# Altium PCB Shining Pig 9V.PcbDoc (part 2 of 3)
Units mm, origin at the board's own origin, x right, y up, seen from the top; angles counter-clockwise.
Board outline 59.05 x 78.83 mm, 2 copper layers (Top Layer, Bottom Layer); 69 components, 43 nets, 179 pads, 197 vias.
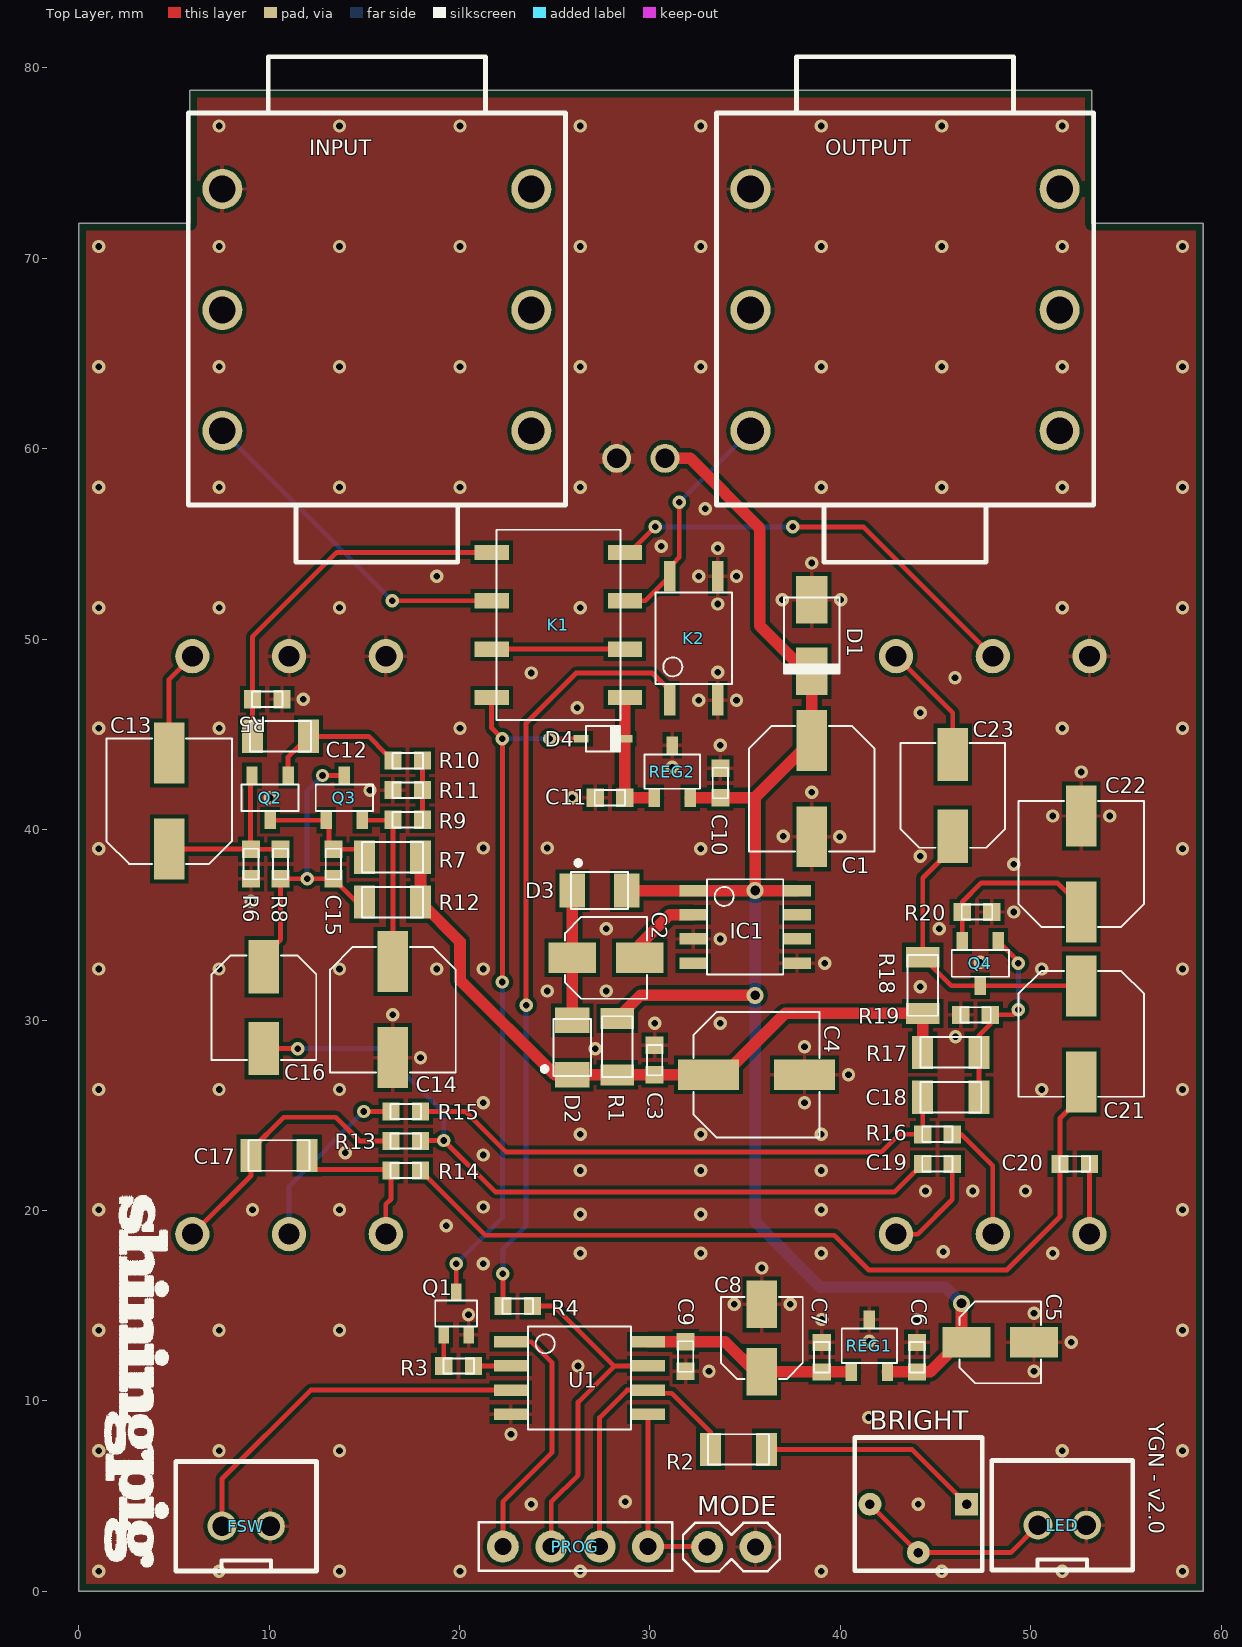
[diagram p0: Top Layer view]

## Part data (continued)
R3: library part CRCW060320K0FKEA, "RES SMD 20K OHM 1% 1/10W 0603", Case/Package=0603, Case Code (Metric)=1608, Manufacturer=Vishay, Max Operating Temperature=155°C, Min Operating Temperature=-55°C, Package Quantity=5000, Power Rating=100mW, Resistance=20kR, Supplier Part Number 1=1469774, Temperature Coefficient=100ppm/°C, Tolerance=1%, Voltage Rating=75V, Case Code (Imperial)=0603, ComponentLink1Description=https://datasheet.ciiva.com/5549/dcrcwe3-109170-5549626.pdf?src-supplier=Mouser, ComponentLink1URL=https://datasheet.ciiva.com/5549/dcrcwe3-109170-5549626.pdf?src-supplier=Mouser, ComponentLink2Description=https://datasheet.ciiva.com/26314/fld-crcw-e3-data-en-26314665.pdf?src-supplier=Distrelec, ComponentLink2URL=https://datasheet.ciiva.com/26314/fld-crcw-e3-data-en-26314665.pdf?src-supplier=Distrelec, ComponentLink3Description=https://datasheet.ciiva.com/3257/dcrcwe3-3257238.pdf?src-supplier=Avnet, ComponentLink3URL=https://datasheet.ciiva.com/3257/dcrcwe3-3257238.pdf?src-supplier=Avnet, ComponentLink4Description=https://datasheet.ciiva.com/7841/1697337-7841574.pdf?src-supplier=Element14, ComponentLink4URL=https://datasheet.ciiva.com/7841/1697337-7841574.pdf?src-supplier=Element14, ComponentLink5Description=https://datasheet.ciiva.com/3257/dcrcwe3-3257239.pdf?src-supplier=Avnet, ComponentLink5URL=https://datasheet.ciiva.com/3257/dcrcwe3-3257239.pdf?src-supplier=Avnet, ComponentLink6Description=https://datasheet.ciiva.com/16351/dcrcwe3-16351112.pdf?src-supplier=Future+Electronics, ComponentLink6URL=https://datasheet.ciiva.com/16351/dcrcwe3-16351112.pdf?src-supplier=Future+Electronics, ComponentLink7Description=https://datasheet.ciiva.com/16893/dcrcw-16893852.pdf?src-supplier=Avnet+Europe, ComponentLink7URL=https://datasheet.ciiva.com/16893/dcrcw-16893852.pdf?src-supplier=Avnet+Europe, Composition="Thick Film", Contact Plating=Tin, Depth=0.85mm, Height=0.45mm, Lead Free="Lead Free", Length=1.55mm, Manufacturer Part Number=CRCW060320K0FKEA, Military Standard=Not, Mount="Surface Mount", Number of Pins=2, Packaging="Tape and Reel", Price=0.0131, Pricing="10=0.0169, 100=0.013, 500=0.0113, 1000=0.008 (EUR)", Radiation Hardening=No, REACH SVHC=Unknown, RoHS=Yes, Stock=71220, Supplier 1=Farnell, Termination=SMD/SMT, Voltage Rating (DC)=75V, Weight=7.1E-05oz, Width=0.85mm
R4 R20: library part CRCW06031K00FKEA, "RES SMD 1K OHM 1% 1/10W 0603", Case/Package=0603, Case Code (Metric)=1608, Manufacturer="Vishay Dale", Max Operating Temperature=155°C, Max Power Dissipation=100mW, Min Operating Temperature=-55°C, Package Quantity=10, Resistance=1kR, Supplier Part Number 1=1469740, Temperature Coefficient=100ppm/°C, Tolerance=1%, Voltage Rating=75V, Case Code (Imperial)=0603, ComponentLink1Description=https://datasheet.ciiva.com/11808/0900766b80d98afc-11808625.pdf?src-supplier=RSComponents, ComponentLink1URL=https://datasheet.ciiva.com/11808/0900766b80d98afc-11808625.pdf?src-supplier=RSComponents, ComponentLink2Description=https://datasheet.ciiva.com/2465/dcrcwe3-2465536.pdf?src-supplier=Digi-Key, ComponentLink2URL=https://datasheet.ciiva.com/2465/dcrcwe3-2465536.pdf?src-supplier=Digi-Key, ComponentLink3Description=https://datasheet.ciiva.com/8336/dcrcwe3-8336822.pdf?src-supplier=Avnet, ComponentLink3URL=https://datasheet.ciiva.com/8336/dcrcwe3-8336822.pdf?src-supplier=Avnet, ComponentLink4Description=https://datasheet.ciiva.com/16515/dcrcwe3-16515078.pdf?src-supplier=Avnet+Asia, ComponentLink4URL=https://datasheet.ciiva.com/16515/dcrcwe3-16515078.pdf?src-supplier=Avnet+Asia, ComponentLink5Description=https://datasheet.ciiva.com/46441/1720486-46441622.pdf?src-supplier=Element14, ComponentLink5URL=https://datasheet.ciiva.com/46441/1720486-46441622.pdf?src-supplier=Element14, ComponentLink6Description=https://datasheet.ciiva.com/26316/fld-crcw-e3-data-en-26316551.pdf?src-supplier=Distrelec, ComponentLink6URL=https://datasheet.ciiva.com/26316/fld-crcw-e3-data-en-26316551.pdf?src-supplier=Distrelec, ComponentLink7Description=https://datasheet.ciiva.com/46441/1720486-46441623.pdf?src-supplier=Element14, ComponentLink7URL=https://datasheet.ciiva.com/46441/1720486-46441623.pdf?src-supplier=Element14, ComponentLink8Description=https://datasheet.ciiva.com/46385/1697337-46385497.pdf?src-supplier=Element14, ComponentLink8URL=https://datasheet.ciiva.com/46385/1697337-46385497.pdf?src-supplier=Element14, ComponentLink9Description=https://datasheet.ciiva.com/3257/dcrcwe3-3257132.pdf?src-supplier=Avnet, ComponentLink9URL=https://datasheet.ciiva.com/3257/dcrcwe3-3257132.pdf?src-supplier=Avnet, ComponentLink10Description=https://datasheet.ciiva.com/16199/dcrcwe3-16199053.pdf?src-supplier=Future+Electronics, ComponentLink10URL=https://datasheet.ciiva.com/16199/dcrcwe3-16199053.pdf?src-supplier=Future+Electronics, ComponentLink11Description=https://datasheet.ciiva.com/2465/dcrcwe3-2465534.pdf?src-supplier=Digi-Key, ComponentLink11URL=https://datasheet.ciiva.com/2465/dcrcwe3-2465534.pdf?src-supplier=Digi-Key, ComponentLink12Description=https://datasheet.ciiva.com/16893/dcrcwe3-16893742.pdf?src-supplier=Avnet+Europe, ComponentLink12URL=https://datasheet.ciiva.com/16893/dcrcwe3-16893742.pdf?src-supplier=Avnet+Europe, ComponentLink13Description=https://datasheet.ciiva.com/2465/dcrcwe3-2465535.pdf?src-supplier=Digi-Key, ComponentLink13URL=https://datasheet.ciiva.com/2465/dcrcwe3-2465535.pdf?src-supplier=Digi-Key, Composition="Thick Film", Contact Plating=Tin, Depth=0.85mm, Features="Automotive AEC-Q200", Height=0.45mm, Lead Free="Lead Free", Length=1.55mm, Manufacturer Part Number=CRCW06031K00FKEA, Military Standard=Not, Mount="Surface Mount", Number of Pins=2, Number of Terminations=2, Packaging="Tape and Reel", Power Rating=100mW, Price=0.013, Pricing="10=0.017, 100=0.0131, 500=0.0114, 1000=0.008, 2500=0.0061 (EUR)", Radiation Hardening=No, REACH SVHC=Unknown, RoHS=Yes, Stock=1083345, Supplier 1=Farnell, Termination=SMD/SMT, Voltage Rating (DC)=75V, Weight=7.1E-05oz, Width=0.033inch
R5: library part CRCW06032M20FKEA, "RES SMD 2.2M OHM 1% 1/10W 0603", Case/Package=0603, Case Code (Metric)=1608, Manufacturer=Vishay, Max Operating Temperature=155°C, Max Power Dissipation=100mW, Min Operating Temperature=-55°C, Package Quantity=10, Resistance=2.2MR, Supplier Part Number 1=2138646, Temperature Coefficient=100ppm/°C, Tolerance=1%, Voltage Rating=75V, Case Code (Imperial)=0603, ComponentLink1Description=https://datasheet.ciiva.com/11810/0900766b80d98afc-11810588.pdf?src-supplier=RSComponents, ComponentLink1URL=https://datasheet.ciiva.com/11810/0900766b80d98afc-11810588.pdf?src-supplier=RSComponents, ComponentLink2Description=https://datasheet.ciiva.com/2466/dcrcwe3-2466118.pdf?src-supplier=Digi-Key, ComponentLink2URL=https://datasheet.ciiva.com/2466/dcrcwe3-2466118.pdf?src-supplier=Digi-Key, ComponentLink3Description=https://datasheet.ciiva.com/22682/1912744-22682662.pdf?src-supplier=Element14, ComponentLink3URL=https://datasheet.ciiva.com/22682/1912744-22682662.pdf?src-supplier=Element14, ComponentLink4Description=https://datasheet.ciiva.com/7801/1697337-7801067.pdf?src-supplier=Element14, ComponentLink4URL=https://datasheet.ciiva.com/7801/1697337-7801067.pdf?src-supplier=Element14, ComponentLink5Description=https://datasheet.ciiva.com/22869/70201119-22869819.pdf?src-supplier=Allied+Electronics, ComponentLink5URL=https://datasheet.ciiva.com/22869/70201119-22869819.pdf?src-supplier=Allied+Electronics, ComponentLink6Description=https://datasheet.ciiva.com/26314/fld-crcw-e3-data-en-26314653.pdf?src-supplier=Distrelec, ComponentLink6URL=https://datasheet.ciiva.com/26314/fld-crcw-e3-data-en-26314653.pdf?src-supplier=Distrelec, ComponentLink7Description=https://datasheet.ciiva.com/3257/dcrcwe3-3257407.pdf?src-supplier=Avnet, ComponentLink7URL=https://datasheet.ciiva.com/3257/dcrcwe3-3257407.pdf?src-supplier=Avnet, ComponentLink8Description=https://datasheet.ciiva.com/2466/dcrcwe3-2466116.pdf?src-supplier=Digi-Key, ComponentLink8URL=https://datasheet.ciiva.com/2466/dcrcwe3-2466116.pdf?src-supplier=Digi-Key, ComponentLink9Description=https://datasheet.ciiva.com/2466/dcrcwe3-2466117.pdf?src-supplier=Digi-Key, ComponentLink9URL=https://datasheet.ciiva.com/2466/dcrcwe3-2466117.pdf?src-supplier=Digi-Key, ComponentLink10Description=https://datasheet.ciiva.com/16498/dcrcwe3-16498313.pdf?src-supplier=Future+Electronics, ComponentLink10URL=https://datasheet.ciiva.com/16498/dcrcwe3-16498313.pdf?src-supplier=Future+Electronics, ComponentLink11Description=https://datasheet.ciiva.com/7801/1697337-7801066.pdf?src-supplier=Element14, ComponentLink11URL=https://datasheet.ciiva.com/7801/1697337-7801066.pdf?src-supplier=Element14, Composition="Thick Film", Contact Plating=Tin, Depth=0.85mm, Features="Automotive AEC-Q200", Height=0.45mm, Lead Free="Lead Free", Length=1.55mm, Manufacturer Part Number=CRCW06032M20FKEA, Military Standard=Not, Mount="Surface Mount", Number of Pins=2, Number of Terminations=2, Packaging="Tape and Reel", Power Rating=100mW, Price=0.0165, Pricing="10=0.0212, 100=0.0163, 500=0.0141, 1000=0.0073 (EUR)", Radiation Hardening=No, REACH SVHC=Unknown, RoHS=Yes, Stock=19125, Supplier 1=Farnell, Termination=SMD/SMT, Voltage Rating (DC)=75V, Weight=7.1E-05oz, Width=0.85mm
R6 R13 R14: library part CRCW06034K70FKEA, "RES SMD 4.7K OHM 1% 1/10W 0603", Case/Package=0603, Case Code (Metric)=1608, Manufacturer=Vishay, Max Operating Temperature=155°C, Min Operating Temperature=-55°C, Package Quantity=5000, Power Rating=100mW, Resistance=4.7kR, Supplier Part Number 1=1469807, Temperature Coefficient=100ppm/°C, Tolerance=1%, Voltage Rating=75V, Case Code (Imperial)=0603, ComponentLink1Description=https://datasheet.ciiva.com/11809/0900766b80d98afc-11809859.pdf?src-supplier=RSComponents, ComponentLink1URL=https://datasheet.ciiva.com/11809/0900766b80d98afc-11809859.pdf?src-supplier=RSComponents, ComponentLink2Description=https://datasheet.ciiva.com/8079/1697337-8079646.pdf?src-supplier=Element14, ComponentLink2URL=https://datasheet.ciiva.com/8079/1697337-8079646.pdf?src-supplier=Element14, ComponentLink3Description=https://datasheet.ciiva.com/15159/getdatasheetpartid-33073-15159382.pdf?src-supplier=Verical, ComponentLink3URL=https://datasheet.ciiva.com/15159/getdatasheetpartid-33073-15159382.pdf?src-supplier=Verical, ComponentLink4Description=https://datasheet.ciiva.com/16199/dcrcwe3-16199366.pdf?src-supplier=Future+Electronics, ComponentLink4URL=https://datasheet.ciiva.com/16199/dcrcwe3-16199366.pdf?src-supplier=Future+Electronics, ComponentLink5Description=https://datasheet.ciiva.com/16764/70201119-16764918.pdf?src-supplier=Allied+Electronics, ComponentLink5URL=https://datasheet.ciiva.com/16764/70201119-16764918.pdf?src-supplier=Allied+Electronics, ComponentLink6Description=https://datasheet.ciiva.com/16520/dcrcwe3-16520616.pdf?src-supplier=Avnet+Asia, ComponentLink6URL=https://datasheet.ciiva.com/16520/dcrcwe3-16520616.pdf?src-supplier=Avnet+Asia, ComponentLink7Description=https://datasheet.ciiva.com/16724/70201119-16724106.pdf?src-supplier=Allied+Electronics, ComponentLink7URL=https://datasheet.ciiva.com/16724/70201119-16724106.pdf?src-supplier=Allied+Electronics, ComponentLink8Description=https://datasheet.ciiva.com/26314/fld-crcw-e3-data-en-26314735.pdf?src-supplier=Distrelec, ComponentLink8URL=https://datasheet.ciiva.com/26314/fld-crcw-e3-data-en-26314735.pdf?src-supplier=Distrelec, Composition="Thick Film", Contact Plating=Tin, Depth=0.85mm, Height=0.45mm, Lead Free="Lead Free", Length=1.55mm, Manufacturer Part Number=CRCW06034K70FKEA, Military Standard=Not, Mount="Surface Mount", Packaging="Tape and Reel", Price=0.0131, Pricing="10=0.0169, 100=0.013, 500=0.0113, 1000=0.0074 (EUR)", REACH SVHC=Unknown, RoHS=Yes, Stock=238464, Supplier 1=Farnell, Termination=SMD/SMT, Voltage Rating (DC)=75V, Weight=7.1E-05oz, Width=0.85mm
R7: library part CRCW1206120KFKEA, "RES SMD 120K OHM 1% 1/4W 1206", Case/Package=1206, Case Code (Metric)=3216, Manufacturer=Vishay, Max Operating Temperature=155°C, Max Power Dissipation=250mW, Min Operating Temperature=-55°C, Package Quantity=10, Resistance=120kR, Supplier Part Number 1=2139596, Temperature Coefficient=100ppm/°C, Tolerance=1%, Voltage Rating=200V, Case Code (Imperial)=1206, ComponentLink1Description=https://datasheet.ciiva.com/11808/0900766b80d98b5e-11808652.pdf?src-supplier=RSComponents, ComponentLink1URL=https://datasheet.ciiva.com/11808/0900766b80d98b5e-11808652.pdf?src-supplier=RSComponents, ComponentLink2Description=https://datasheet.ciiva.com/7714/1697337-7714312.pdf?src-supplier=Element14, ComponentLink2URL=https://datasheet.ciiva.com/7714/1697337-7714312.pdf?src-supplier=Element14, ComponentLink3Description=https://datasheet.ciiva.com/7714/1697337-7714313.pdf?src-supplier=Element14, ComponentLink3URL=https://datasheet.ciiva.com/7714/1697337-7714313.pdf?src-supplier=Element14, ComponentLink4Description=https://datasheet.ciiva.com/22708/1697337-22708105.pdf?src-supplier=Element14, ComponentLink4URL=https://datasheet.ciiva.com/22708/1697337-22708105.pdf?src-supplier=Element14, ComponentLink5Description=https://datasheet.ciiva.com/22675/1847332-22675915.pdf?src-supplier=Element14, ComponentLink5URL=https://datasheet.ciiva.com/22675/1847332-22675915.pdf?src-supplier=Element14, ComponentLink6Description=https://datasheet.ciiva.com/2469/dcrcwe3-2469512.pdf?src-supplier=Digi-Key, ComponentLink6URL=https://datasheet.ciiva.com/2469/dcrcwe3-2469512.pdf?src-supplier=Digi-Key, ComponentLink7Description=https://datasheet.ciiva.com/2469/dcrcwe3-2469510.pdf?src-supplier=Digi-Key, ComponentLink7URL=https://datasheet.ciiva.com/2469/dcrcwe3-2469510.pdf?src-supplier=Digi-Key, ComponentLink8Description=https://datasheet.ciiva.com/2469/dcrcwe3-2469511.pdf?src-supplier=Digi-Key, ComponentLink8URL=https://datasheet.ciiva.com/2469/dcrcwe3-2469511.pdf?src-supplier=Digi-Key, ComponentLink9Description=https://datasheet.ciiva.com/26316/fld-crcw-e3-data-en-26316475.pdf?src-supplier=Distrelec, ComponentLink9URL=https://datasheet.ciiva.com/26316/fld-crcw-e3-data-en-26316475.pdf?src-supplier=Distrelec, ComponentLink10Description=https://datasheet.ciiva.com/7800/125364-7800558.pdf?src-supplier=Element14, ComponentLink10URL=https://datasheet.ciiva.com/7800/125364-7800558.pdf?src-supplier=Element14, Composition="Thick Film", Contact Plating=Tin, Depth=1.6mm, Features="Automotive AEC-Q200", Height=0.55mm, Lead Free="Lead Free", Length=3.2mm, Manufacturer Part Number=CRCW1206120KFKEA, Military Standard=Not, Number of Terminations=2, Packaging="Tape and Reel", Power Rating=250mW, Price=0.028, Pricing="10=0.0415, 100=0.0276, 500=0.0231, 1000=0.0126, 2500=0.0116 (EUR)", Radiation Hardening=No, REACH SVHC=Unknown, RoHS=Yes, Stock=30156, Supplier 1=Farnell, Termination=SMD/SMT, Voltage Rating (DC)=200V, Weight=0.000353oz, Width=1.6mm
R8: library part CRCW060312K0FKEA, "RES SMD 12K OHM 1% 1/10W 0603", Case/Package=0603, Case Code (Metric)=1608, Manufacturer=Vishay, Max Operating Temperature=155°C, Max Power Dissipation=100mW, Min Operating Temperature=-55°C, Package Quantity=10, Resistance=12kR, Supplier Part Number 1=1652834, Temperature Coefficient=100ppm/°C, Tolerance=1%, Voltage Rating=75V, Case Code (Imperial)=0603, ComponentLink1Description=https://datasheet.ciiva.com/11811/0900766b80d98afc-11811312.pdf?src-supplier=RSComponents, ComponentLink1URL=https://datasheet.ciiva.com/11811/0900766b80d98afc-11811312.pdf?src-supplier=RSComponents, ComponentLink2Description=https://datasheet.ciiva.com/2466/dcrcwe3-2466560.pdf?src-supplier=Digi-Key, ComponentLink2URL=https://datasheet.ciiva.com/2466/dcrcwe3-2466560.pdf?src-supplier=Digi-Key, ComponentLink3Description=https://datasheet.ciiva.com/2466/dcrcwe3-2466561.pdf?src-supplier=Digi-Key, ComponentLink3URL=https://datasheet.ciiva.com/2466/dcrcwe3-2466561.pdf?src-supplier=Digi-Key, ComponentLink4Description=https://datasheet.ciiva.com/2466/dcrcwe3-2466562.pdf?src-supplier=Digi-Key, ComponentLink4URL=https://datasheet.ciiva.com/2466/dcrcwe3-2466562.pdf?src-supplier=Digi-Key, ComponentLink5Description=https://datasheet.ciiva.com/16430/dcrcwe3-16430069.pdf?src-supplier=Future+Electronics, ComponentLink5URL=https://datasheet.ciiva.com/16430/dcrcwe3-16430069.pdf?src-supplier=Future+Electronics, ComponentLink6Description=https://datasheet.ciiva.com/16515/dcrcwe3-16515029.pdf?src-supplier=Avnet+Asia, ComponentLink6URL=https://datasheet.ciiva.com/16515/dcrcwe3-16515029.pdf?src-supplier=Avnet+Asia, ComponentLink7Description=https://datasheet.ciiva.com/3256/dcrcwe3-3256998.pdf?src-supplier=Avnet, ComponentLink7URL=https://datasheet.ciiva.com/3256/dcrcwe3-3256998.pdf?src-supplier=Avnet, ComponentLink8Description=https://datasheet.ciiva.com/5545/dcrcwe3-109170-5545254.pdf?src-supplier=Mouser, ComponentLink8URL=https://datasheet.ciiva.com/5545/dcrcwe3-109170-5545254.pdf?src-supplier=Mouser, ComponentLink9Description=https://datasheet.ciiva.com/3256/dcrcwe3-3256999.pdf?src-supplier=Avnet, ComponentLink9URL=https://datasheet.ciiva.com/3256/dcrcwe3-3256999.pdf?src-supplier=Avnet, ComponentLink10Description=https://datasheet.ciiva.com/7841/1533075-7841820.pdf?src-supplier=Element14, ComponentLink10URL=https://datasheet.ciiva.com/7841/1533075-7841820.pdf?src-supplier=Element14, ComponentLink11Description=https://datasheet.ciiva.com/16885/dcrcwe3-16885263.pdf?src-supplier=Avnet+Europe, ComponentLink11URL=https://datasheet.ciiva.com/16885/dcrcwe3-16885263.pdf?src-supplier=Avnet+Europe, Composition="Thick Film", Contact Plating=Tin, Depth=0.85mm, Features="Automotive AEC-Q200", Height=0.45mm, Lead Free="Lead Free", Length=1.55mm, Manufacturer Part Number=CRCW060312K0FKEA, Military Standard=Not, Mount="Surface Mount", Number of Terminations=2, Packaging="Tape and Reel", Power Rating=100mW, Price=0.0074, Pricing="10=0.0169, 100=0.013, 500=0.0113, 1000=0.0068 (EUR)", Radiation Hardening=No, REACH SVHC=Unknown, RoHS=Yes, Stock=58266, Supplier 1=Farnell, Termination=SMD/SMT, Voltage Rating (DC)=75V, Weight=7.1E-05oz, Width=0.033inch
R9: library part CRCW0603470RFKEA, "RES SMD 470 OHM 1% 1/10W 0603", Case/Package=0603, Case Code (Metric)=1608, Manufacturer=Vishay, Max Operating Temperature=155°C, Max Power Dissipation=100mW, Min Operating Temperature=-55°C, Package Quantity=10, Supplier Part Number 1=1469815, Temperature Coefficient=100ppm/°C, Tolerance=1%, Voltage Rating=75V, Case Code (Imperial)=0603, ComponentLink1Description=https://datasheet.ciiva.com/11808/0900766b80d98afc-11808677.pdf?src-supplier=RSComponents, ComponentLink1URL=https://datasheet.ciiva.com/11808/0900766b80d98afc-11808677.pdf?src-supplier=RSComponents, ComponentLink2Description=https://datasheet.ciiva.com/2465/dcrcwe3-2465555.pdf?src-supplier=Digi-Key, ComponentLink2URL=https://datasheet.ciiva.com/2465/dcrcwe3-2465555.pdf?src-supplier=Digi-Key, ComponentLink3Description=https://datasheet.ciiva.com/5551/dcrcwe3-109170-5551784.pdf?src-supplier=Mouser, ComponentLink3URL=https://datasheet.ciiva.com/5551/dcrcwe3-109170-5551784.pdf?src-supplier=Mouser, ComponentLink4Description=https://datasheet.ciiva.com/7777/1720486-7777560.pdf?src-supplier=Element14, ComponentLink4URL=https://datasheet.ciiva.com/7777/1720486-7777560.pdf?src-supplier=Element14, ComponentLink5Description=https://datasheet.ciiva.com/7777/1720486-7777561.pdf?src-supplier=Element14, ComponentLink5URL=https://datasheet.ciiva.com/7777/1720486-7777561.pdf?src-supplier=Element14, ComponentLink6Description=https://datasheet.ciiva.com/26316/fld-crcw-e3-data-en-26316542.pdf?src-supplier=Distrelec, ComponentLink6URL=https://datasheet.ciiva.com/26316/fld-crcw-e3-data-en-26316542.pdf?src-supplier=Distrelec, ComponentLink7Description=https://datasheet.ciiva.com/2465/dcrcwe3-2465556.pdf?src-supplier=Digi-Key, ComponentLink7URL=https://datasheet.ciiva.com/2465/dcrcwe3-2465556.pdf?src-supplier=Digi-Key, ComponentLink8Description=https://datasheet.ciiva.com/2465/dcrcwe3-2465557.pdf?src-supplier=Digi-Key, ComponentLink8URL=https://datasheet.ciiva.com/2465/dcrcwe3-2465557.pdf?src-supplier=Digi-Key, ComponentLink9Description=https://datasheet.ciiva.com/15159/getdatasheetpartid-45798-15159558.pdf?src-supplier=Verical, ComponentLink9URL=https://datasheet.ciiva.com/15159/getdatasheetpartid-45798-15159558.pdf?src-supplier=Verical, ComponentLink10Description=https://datasheet.ciiva.com/16893/dcrcw-16893414.pdf?src-supplier=Avnet+Europe, ComponentLink10URL=https://datasheet.ciiva.com/16893/dcrcw-16893414.pdf?src-supplier=Avnet+Europe, ComponentLink11Description=https://datasheet.ciiva.com/3257/dcrcwe3-3257623.pdf?src-supplier=Avnet, ComponentLink11URL=https://datasheet.ciiva.com/3257/dcrcwe3-3257623.pdf?src-supplier=Avnet, ComponentLink12Description=https://datasheet.ciiva.com/3257/dcrcwe3-3257624.pdf?src-supplier=Avnet, ComponentLink12URL=https://datasheet.ciiva.com/3257/dcrcwe3-3257624.pdf?src-supplier=Avnet, ComponentLink13Description=https://datasheet.ciiva.com/7777/1697337-7777322.pdf?src-supplier=Element14, ComponentLink13URL=https://datasheet.ciiva.com/7777/1697337-7777322.pdf?src-supplier=Element14, Composition="Thick Film", Contact Plating=Tin, Depth=0.85mm, Features="Automotive AEC-Q200", Height=0.45mm, Lead Free="Lead Free", Length=1.55mm, Manufacturer Part Number=CRCW0603470RFKEA, Military Standard=Not, Mount="Surface Mount", Number of Terminations=2, Packaging="Tape and Reel", Power Rating=100mW, Price=0.0129, Pricing="10=0.017, 100=0.0131, 500=0.0114, 1000=0.008 (EUR)", Radiation Hardening=No, REACH SVHC=Unknown, Resistance=470R, RoHS=Yes, Stock=171327, Supplier 1=Farnell, Termination=SMD/SMT, Voltage Rating (DC)=75V, Weight=7.1E-05oz, Width=0.033inch
R10: library part CRCW0603150KFKEA, "RES SMD 150K OHM 1% 1/10W 0603", Case/Package=0603, Case Code (Metric)=1608, Manufacturer=Vishay, Max Operating Temperature=155°C, Min Operating Temperature=-55°C, Package Quantity=5000, Power Rating=100mW, Resistance=150kR, Supplier Part Number 1=1469759, Temperature Coefficient=100ppm/°C, Tolerance=1%, Voltage Rating=75V, Case Code (Imperial)=0603, ComponentLink1Description=https://datasheet.ciiva.com/11809/0900766b80d98afc-11809072.pdf?src-supplier=RSComponents, ComponentLink1URL=https://datasheet.ciiva.com/11809/0900766b80d98afc-11809072.pdf?src-supplier=RSComponents, ComponentLink2Description=https://datasheet.ciiva.com/5551/dcrcwe3-109170-5551862.pdf?src-supplier=Mouser, ComponentLink2URL=https://datasheet.ciiva.com/5551/dcrcwe3-109170-5551862.pdf?src-supplier=Mouser, ComponentLink3Description=https://datasheet.ciiva.com/3257/dcrcwe3-3257048.pdf?src-supplier=Avnet, ComponentLink3URL=https://datasheet.ciiva.com/3257/dcrcwe3-3257048.pdf?src-supplier=Avnet, ComponentLink4Description=https://datasheet.ciiva.com/7673/1697337-7673288.pdf?src-supplier=Element14, ComponentLink4URL=https://datasheet.ciiva.com/7673/1697337-7673288.pdf?src-supplier=Element14, ComponentLink5Description=https://datasheet.ciiva.com/3257/dcrcwe3-3257049.pdf?src-supplier=Avnet, ComponentLink5URL=https://datasheet.ciiva.com/3257/dcrcwe3-3257049.pdf?src-supplier=Avnet, ComponentLink6Description=https://datasheet.ciiva.com/16885/dcrcwe3-16885417.pdf?src-supplier=Avnet+Europe, ComponentLink6URL=https://datasheet.ciiva.com/16885/dcrcwe3-16885417.pdf?src-supplier=Avnet+Europe, ComponentLink7Description=https://datasheet.ciiva.com/15159/getdatasheetpartid-37540-15159436.pdf?src-supplier=Verical, ComponentLink7URL=https://datasheet.ciiva.com/15159/getdatasheetpartid-37540-15159436.pdf?src-supplier=Verical, ComponentLink8Description=https://datasheet.ciiva.com/16391/dcrcwe3-16391407.pdf?src-supplier=Future+Electronics, ComponentLink8URL=https://datasheet.ciiva.com/16391/dcrcwe3-16391407.pdf?src-supplier=Future+Electronics, ComponentLink9Description=https://datasheet.ciiva.com/16761/70201119-16761887.pdf?src-supplier=Allied+Electronics, ComponentLink9URL=https://datasheet.ciiva.com/16761/70201119-16761887.pdf?src-supplier=Allied+Electronics, Composition="Thick Film", Contact Plating=Tin, Depth=0.85mm, Height=0.45mm, Lead Free="Lead Free", Length=1.55mm, Manufacturer Part Number=CRCW0603150KFKEA, Military Standard=Not, Mount="Surface Mount", Packaging="Tape and Reel", Price=0.0093, Pricing="10=0.0112, 100=0.0092, 500=0.0084, 1000=0.0075 (EUR)", REACH SVHC=Unknown, RoHS=Yes, Stock=76499, Supplier 1=Farnell, Termination=SMD/SMT, Voltage Rating (DC)=75V, Weight=7.1E-05oz, Width=0.85mm
R11: library part CRCW06031K20FKEA, "RES SMD 1.2K OHM 1% 1/10W 0603", Case/Package=0603, Case Code (Metric)=1608, Manufacturer=Vishay, Max Operating Temperature=155°C, Max Power Dissipation=100mW, Min Operating Temperature=-55°C, Package Quantity=10, Resistance=1.2kR, Supplier Part Number 1=1469741, Temperature Coefficient=100ppm/°C, Tolerance=1%, Voltage Rating=75V, Case Code (Imperial)=0603, ComponentLink1Description=https://datasheet.ciiva.com/11811/0900766b80d98afc-11811521.pdf?src-supplier=RSComponents, ComponentLink1URL=https://datasheet.ciiva.com/11811/0900766b80d98afc-11811521.pdf?src-supplier=RSComponents, ComponentLink2Description=https://datasheet.ciiva.com/26316/fld-crcw-e3-data-en-26316553.pdf?src-supplier=Distrelec, ComponentLink2URL=https://datasheet.ciiva.com/26316/fld-crcw-e3-data-en-26316553.pdf?src-supplier=Distrelec, ComponentLink3Description=https://datasheet.ciiva.com/5562/dcrcwe3-109170-5562444.pdf?src-supplier=Mouser, ComponentLink3URL=https://datasheet.ciiva.com/5562/dcrcwe3-109170-5562444.pdf?src-supplier=Mouser, ComponentLink4Description=https://datasheet.ciiva.com/7777/1697337-7777549.pdf?src-supplier=Element14, ComponentLink4URL=https://datasheet.ciiva.com/7777/1697337-7777549.pdf?src-supplier=Element14, ComponentLink5Description=https://datasheet.ciiva.com/2466/dcrcwe3-2466208.pdf?src-supplier=Digi-Key, ComponentLink5URL=https://datasheet.ciiva.com/2466/dcrcwe3-2466208.pdf?src-supplier=Digi-Key, ComponentLink6Description=https://datasheet.ciiva.com/16778/70201119-16778936.pdf?src-supplier=Allied+Electronics, ComponentLink6URL=https://datasheet.ciiva.com/16778/70201119-16778936.pdf?src-supplier=Allied+Electronics, ComponentLink7Description=https://datasheet.ciiva.com/22871/70201119-22871945.pdf?src-supplier=Allied+Electronics, ComponentLink7URL=https://datasheet.ciiva.com/22871/70201119-22871945.pdf?src-supplier=Allied+Electronics, ComponentLink8Description=https://datasheet.ciiva.com/7777/1697337-7777291.pdf?src-supplier=Element14, ComponentLink8URL=https://datasheet.ciiva.com/7777/1697337-7777291.pdf?src-supplier=Element14, ComponentLink9Description=https://datasheet.ciiva.com/2466/dcrcwe3-2466206.pdf?src-supplier=Digi-Key, ComponentLink9URL=https://datasheet.ciiva.com/2466/dcrcwe3-2466206.pdf?src-supplier=Digi-Key, ComponentLink10Description=https://datasheet.ciiva.com/2466/dcrcwe3-2466207.pdf?src-supplier=Digi-Key, ComponentLink10URL=https://datasheet.ciiva.com/2466/dcrcwe3-2466207.pdf?src-supplier=Digi-Key, Composition="Thick Film", Contact Plating=Tin, Depth=0.85mm, Features="Automotive AEC-Q200", Height=0.45mm, Lead Free="Lead Free", Length=1.55mm, Manufacturer Part Number=CRCW06031K20FKEA, Military Standard=Not, Mount="Surface Mount", Number of Terminations=2, Packaging="Tape and Reel", Power Rating=100mW, Price=0.0128, Pricing="10=0.0169, 100=0.013, 500=0.0113, 1000=0.008 (EUR)", Radiation Hardening=No, REACH SVHC=Unknown, RoHS=Yes, Stock=73390, Supplier 1=Farnell, Termination=SMD/SMT, Voltage Rating (DC)=75V, Weight=7.1E-05oz, Width=0.033inch
R12: library part CRCW12061K80FKEA, "RES SMD 1.8K OHM 1% 1/4W 1206", Case/Package=1206, Case Code (Metric)=3216, Manufacturer=Vishay, Max Operating Temperature=155°C, Max Power Dissipation=250mW, Min Operating Temperature=-55°C, Package Quantity=10, Resistance=1.8kR, Supplier Part Number 1=2139458, Temperature Coefficient=100ppm/°C, Tolerance=1%, Voltage Rating=200V, Case Code (Imperial)=1206, ComponentLink1Description=https://datasheet.ciiva.com/11811/0900766b80d98b5e-11811553.pdf?src-supplier=RSComponents, ComponentLink1URL=https://datasheet.ciiva.com/11811/0900766b80d98b5e-11811553.pdf?src-supplier=RSComponents, ComponentLink2Description=https://datasheet.ciiva.com/2515/dcrcwe3-2515619.pdf?src-supplier=Digi-Key, ComponentLink2URL=https://datasheet.ciiva.com/2515/dcrcwe3-2515619.pdf?src-supplier=Digi-Key, ComponentLink3Description=https://datasheet.ciiva.com/2515/dcrcwe3-2515620.pdf?src-supplier=Digi-Key, ComponentLink3URL=https://datasheet.ciiva.com/2515/dcrcwe3-2515620.pdf?src-supplier=Digi-Key, ComponentLink4Description=https://datasheet.ciiva.com/2515/dcrcwe3-2515621.pdf?src-supplier=Digi-Key, ComponentLink4URL=https://datasheet.ciiva.com/2515/dcrcwe3-2515621.pdf?src-supplier=Digi-Key, ComponentLink5Description=https://datasheet.ciiva.com/5550/dcrcwe3-109170-5550215.pdf?src-supplier=Mouser, ComponentLink5URL=https://datasheet.ciiva.com/5550/dcrcwe3-109170-5550215.pdf?src-supplier=Mouser, ComponentLink6Description=https://datasheet.ciiva.com/17203/dcrcwe3-17203511.pdf?src-supplier=Avnet+Europe, ComponentLink6URL=https://datasheet.ciiva.com/17203/dcrcwe3-17203511.pdf?src-supplier=Avnet+Europe, ComponentLink7Description=https://datasheet.ciiva.com/22704/1697337-22704456.pdf?src-supplier=Element14, ComponentLink7URL=https://datasheet.ciiva.com/22704/1697337-22704456.pdf?src-supplier=Element14, ComponentLink8Description=https://datasheet.ciiva.com/9096/dcrcwe3-9096428.pdf?src-supplier=Avnet, ComponentLink8URL=https://datasheet.ciiva.com/9096/dcrcwe3-9096428.pdf?src-supplier=Avnet, ComponentLink9Description=https://datasheet.ciiva.com/7673/1697337-7673053.pdf?src-supplier=Element14, ComponentLink9URL=https://datasheet.ciiva.com/7673/1697337-7673053.pdf?src-supplier=Element14, ComponentLink10Description=https://datasheet.ciiva.com/7800/125364-7800621.pdf?src-supplier=Element14, ComponentLink10URL=https://datasheet.ciiva.com/7800/125364-7800621.pdf?src-supplier=Element14, ComponentLink11Description=https://datasheet.ciiva.com/7673/1697337-7673054.pdf?src-supplier=Element14, ComponentLink11URL=https://datasheet.ciiva.com/7673/1697337-7673054.pdf?src-supplier=Element14, ComponentLink12Description=https://datasheet.ciiva.com/16763/70201119-16763566.pdf?src-supplier=Allied+Electronics, ComponentLink12URL=https://datasheet.ciiva.com/16763/70201119-16763566.pdf?src-supplier=Allied+Electronics, ComponentLink13Description=https://datasheet.ciiva.com/16498/dcrcwe3-16498255.pdf?src-supplier=Future+Electronics, ComponentLink13URL=https://datasheet.ciiva.com/16498/dcrcwe3-16498255.pdf?src-supplier=Future+Electronics, Composition="Thick Film", Contact Plating=Tin, Depth=1.6mm, Features="Automotive AEC-Q200", Height=0.55mm, Lead Free="Lead Free", Length=3.2mm, Manufacturer Part Number=CRCW12061K80FKEA, Military Standard=Not, Number of Terminations=2, Packaging="Tape and Reel", Power Rating=250mW, Price=0.0273, Pricing="10=0.0415, 100=0.0276, 500=0.023, 1000=0.0135, 2500=0.0116 (EUR)", Radiation Hardening=No, REACH SVHC=Unknown, RoHS=Yes, Stock=21216, Supplier 1=Farnell, Termination=SMD/SMT, Voltage Rating (DC)=200V, Weight=0.000353oz, Width=0.063inch
R15: library part CRCW060339K0FKEA, "RES SMD 39K OHM 1% 1/10W 0603", Case/Package=0603, Case Code (Metric)=1608, Manufacturer=Vishay, Max Operating Temperature=155°C, Max Power Dissipation=100mW, Min Operating Temperature=-55°C, Package Quantity=10, Resistance=39kR, Supplier Part Number 1=1469804, Temperature Coefficient=100ppm/°C, Tolerance=1%, Voltage Rating=75V, Case Code (Imperial)=0603, ComponentLink1Description=https://datasheet.ciiva.com/11810/0900766b80d98afc-11810034.pdf?src-supplier=RSComponents, ComponentLink1URL=https://datasheet.ciiva.com/11810/0900766b80d98afc-11810034.pdf?src-supplier=RSComponents, ComponentLink2Description=https://datasheet.ciiva.com/16436/dcrcwe3-16436039.pdf?src-supplier=Future+Electronics, ComponentLink2URL=https://datasheet.ciiva.com/16436/dcrcwe3-16436039.pdf?src-supplier=Future+Electronics, ComponentLink3Description=https://datasheet.ciiva.com/2465/dcrcwe3-2465918.pdf?src-supplier=Digi-Key, ComponentLink3URL=https://datasheet.ciiva.com/2465/dcrcwe3-2465918.pdf?src-supplier=Digi-Key, ComponentLink4Description=https://datasheet.ciiva.com/3257/dcrcwe3-3257518.pdf?src-supplier=Avnet, ComponentLink4URL=https://datasheet.ciiva.com/3257/dcrcwe3-3257518.pdf?src-supplier=Avnet, ComponentLink5Description=https://datasheet.ciiva.com/2465/dcrcwe3-2465920.pdf?src-supplier=Digi-Key, ComponentLink5URL=https://datasheet.ciiva.com/2465/dcrcwe3-2465920.pdf?src-supplier=Digi-Key, ComponentLink6Description=https://datasheet.ciiva.com/7841/1697337-7841830.pdf?src-supplier=Element14, ComponentLink6URL=https://datasheet.ciiva.com/7841/1697337-7841830.pdf?src-supplier=Element14, ComponentLink7Description=https://datasheet.ciiva.com/16514/dcrcwe3-16514791.pdf?src-supplier=Avnet+Asia, ComponentLink7URL=https://datasheet.ciiva.com/16514/dcrcwe3-16514791.pdf?src-supplier=Avnet+Asia, ComponentLink8Description=https://datasheet.ciiva.com/16768/70201119-16768839.pdf?src-supplier=Allied+Electronics, ComponentLink8URL=https://datasheet.ciiva.com/16768/70201119-16768839.pdf?src-supplier=Allied+Electronics, ComponentLink9Description=https://datasheet.ciiva.com/7841/1697337-7841593.pdf?src-supplier=Element14, ComponentLink9URL=https://datasheet.ciiva.com/7841/1697337-7841593.pdf?src-supplier=Element14, ComponentLink10Description=https://datasheet.ciiva.com/3257/dcrcwe3-3257519.pdf?src-supplier=Avnet, ComponentLink10URL=https://datasheet.ciiva.com/3257/dcrcwe3-3257519.pdf?src-supplier=Avnet, ComponentLink11Description=https://datasheet.ciiva.com/26316/fld-crcw-e3-data-en-26316550.pdf?src-supplier=Distrelec, ComponentLink11URL=https://datasheet.ciiva.com/26316/fld-crcw-e3-data-en-26316550.pdf?src-supplier=Distrelec, ComponentLink12Description=https://datasheet.ciiva.com/2465/dcrcwe3-2465919.pdf?src-supplier=Digi-Key, ComponentLink12URL=https://datasheet.ciiva.com/2465/dcrcwe3-2465919.pdf?src-supplier=Digi-Key, ComponentLink13Description=https://datasheet.ciiva.com/5551/dcrcwe3-109170-5551951.pdf?src-supplier=Mouser, ComponentLink13URL=https://datasheet.ciiva.com/5551/dcrcwe3-109170-5551951.pdf?src-supplier=Mouser, Composition="Thick Film", Contact Plating=Tin, Depth=0.85mm, Features="Automotive AEC-Q200", Height=0.45mm, Lead Free="Lead Free", Length=1.55mm, Manufacturer Part Number=CRCW060339K0FKEA, Military Standard=Not, Mount="Surface Mount", Number of Pins=2, Number of Terminations=2, Packaging="Tape and Reel", Power Rating=100mW, Price=0.0093, Pricing="10=0.0112, 100=0.0092, 500=0.0084, 1000=0.0075 (EUR)", Radiation Hardening=No, REACH SVHC=Unknown, RoHS=Yes, Stock=76312, Supplier 1=Farnell, Termination=SMD/SMT, Voltage Rating (DC)=75V, Weight=7.1E-05oz, Width=0.033inch
R16: library part CRCW06035K60FKEA, "RES SMD 5.6K OHM 1% 1/10W 0603", Case/Package=0603, Case Code (Metric)=1608, Manufacturer=Vishay, Max Operating Temperature=155°C, Min Operating Temperature=-55°C, Package Quantity=5000, Power Rating=100mW, Resistance=5.6kR, Supplier Part Number 1=1469820, Temperature Coefficient=100ppm/°C, Tolerance=1%, Voltage Rating=75V, Case Code (Imperial)=0603, ComponentLink1Description=https://datasheet.ciiva.com/3883/41405319s7915995n6892-3883091.pdf?src-supplier=Arrow, ComponentLink1URL=https://datasheet.ciiva.com/3883/41405319s7915995n6892-3883091.pdf?src-supplier=Arrow, ComponentLink2Description=https://datasheet.ciiva.com/11809/0900766b80d98afc-11809147.pdf?src-supplier=RSComponents, ComponentLink2URL=https://datasheet.ciiva.com/11809/0900766b80d98afc-11809147.pdf?src-supplier=RSComponents, ComponentLink3Description=https://datasheet.ciiva.com/26314/fld-crcw-e3-data-en-26314743.pdf?src-supplier=Distrelec, ComponentLink3URL=https://datasheet.ciiva.com/26314/fld-crcw-e3-data-en-26314743.pdf?src-supplier=Distrelec, ComponentLink4Description=https://datasheet.ciiva.com/16786/70201119-16786959.pdf?src-supplier=Allied+Electronics, ComponentLink4URL=https://datasheet.ciiva.com/16786/70201119-16786959.pdf?src-supplier=Allied+Electronics, ComponentLink5Description=https://datasheet.ciiva.com/3257/dcrcwe3-3257768.pdf?src-supplier=Avnet, ComponentLink5URL=https://datasheet.ciiva.com/3257/dcrcwe3-3257768.pdf?src-supplier=Avnet, ComponentLink6Description=https://datasheet.ciiva.com/3257/dcrcwe3-3257769.pdf?src-supplier=Avnet, ComponentLink6URL=https://datasheet.ciiva.com/3257/dcrcwe3-3257769.pdf?src-supplier=Avnet, ComponentLink7Description=https://datasheet.ciiva.com/7841/1697337-7841836.pdf?src-supplier=Element14, ComponentLink7URL=https://datasheet.ciiva.com/7841/1697337-7841836.pdf?src-supplier=Element14, ComponentLink8Description=https://datasheet.ciiva.com/7841/1697337-7841613.pdf?src-supplier=Element14, ComponentLink8URL=https://datasheet.ciiva.com/7841/1697337-7841613.pdf?src-supplier=Element14, Composition="Thick Film", Contact Plating=Tin, Depth=0.85mm, Height=0.45mm, Lead Free="Lead Free", Length=1.55mm, Manufacturer Part Number=CRCW06035K60FKEA, Military Standard=Not, Mount="Surface Mount", Number of Pins=2, Number of Terminations=2, Packaging="Tape and Reel", Price=0.0093, Pricing="10=0.0112, 100=0.0092, 500=0.0084, 1000=0.0061 (EUR)", Radiation Hardening=No, REACH SVHC=Unknown, RoHS=Yes, Stock=87511, Supplier 1=Farnell, Termination=SMD/SMT, Voltage Rating (DC)=75V, Weight=7.1E-05oz, Width=0.85mm, Working Voltage=75V
R17: library part CRCW1206180KFKEA, "RES SMD 180K OHM 1% 1/4W 1206", Case/Package=1206, Case Code (Metric)=3216, Manufacturer=Vishay, Max Operating Temperature=155°C, Max Power Dissipation=250mW, Min Operating Temperature=-55°C, Package Quantity=10, Resistance=180kR, Supplier Part Number 1=2139611, Temperature Coefficient=100ppm/°C, Tolerance=1%, Voltage Rating=200V, Case Code (Imperial)=1206, ComponentLink1Description=https://datasheet.ciiva.com/11811/0900766b80d98b5e-11811640.pdf?src-supplier=RSComponents, ComponentLink1URL=https://datasheet.ciiva.com/11811/0900766b80d98b5e-11811640.pdf?src-supplier=RSComponents, ComponentLink2Description=https://datasheet.ciiva.com/2515/dcrcwe3-2515718.pdf?src-supplier=Digi-Key, ComponentLink2URL=https://datasheet.ciiva.com/2515/dcrcwe3-2515718.pdf?src-supplier=Digi-Key, ComponentLink3Description=https://datasheet.ciiva.com/2515/dcrcwe3-2515719.pdf?src-supplier=Digi-Key, ComponentLink3URL=https://datasheet.ciiva.com/2515/dcrcwe3-2515719.pdf?src-supplier=Digi-Key, ComponentLink4Description=https://datasheet.ciiva.com/2515/dcrcwe3-2515720.pdf?src-supplier=Digi-Key, ComponentLink4URL=https://datasheet.ciiva.com/2515/dcrcwe3-2515720.pdf?src-supplier=Digi-Key, ComponentLink5Description=https://datasheet.ciiva.com/7714/1697337-7714344.pdf?src-supplier=Element14, ComponentLink5URL=https://datasheet.ciiva.com/7714/1697337-7714344.pdf?src-supplier=Element14, ComponentLink6Description=https://datasheet.ciiva.com/26316/fld-crcw-e3-data-en-26316477.pdf?src-supplier=Distrelec, ComponentLink6URL=https://datasheet.ciiva.com/26316/fld-crcw-e3-data-en-26316477.pdf?src-supplier=Distrelec, ComponentLink7Description=https://datasheet.ciiva.com/8964/dcrcwe3-8964238.pdf?src-supplier=Avnet, ComponentLink7URL=https://datasheet.ciiva.com/8964/dcrcwe3-8964238.pdf?src-supplier=Avnet, ComponentLink8Description=https://datasheet.ciiva.com/7714/1697337-7714345.pdf?src-supplier=Element14, ComponentLink8URL=https://datasheet.ciiva.com/7714/1697337-7714345.pdf?src-supplier=Element14, ComponentLink9Description=https://datasheet.ciiva.com/22708/1697337-22708109.pdf?src-supplier=Element14, ComponentLink9URL=https://datasheet.ciiva.com/22708/1697337-22708109.pdf?src-supplier=Element14, Composition="Thick Film", Contact Plating=Tin, Depth=1.6mm, Features="Automotive AEC-Q200", Height=0.55mm, Lead Free="Lead Free", Length=3.2mm, Manufacturer Part Number=CRCW1206180KFKEA, Military Standard=Not, Mount="Surface Mount", Number of Pins=2, Number of Terminations=2, Packaging="Tape and Reel", Power Rating=250mW, Price=0.0283, Pricing="10=0.0415, 100=0.0276, 500=0.0231, 1000=0.0135, 2500=0.0116 (EUR)", Radiation Hardening=No, REACH SVHC=Unknown, RoHS=Yes, Stock=15809, Supplier 1=Farnell, Termination=SMD/SMT, Voltage Rating (DC)=200V, Weight=0.000353oz, Width=1.6mm, Working Voltage=200V
R18: library part CRCW12063K90FKEA, "RES SMD 3.9K OHM 1% 1/4W 1206", Case/Package=1206, Case Code (Metric)=3216, Manufacturer=Vishay, Max Operating Temperature=155°C, Max Power Dissipation=250mW, Min Operating Temperature=-55°C, Package Quantity=10, Resistance=3.9kR, Supplier Part Number 1=1653127, Temperature Coefficient=100ppm/°C, Tolerance=1%, Voltage Rating=200V, Case Code (Imperial)=1206, ComponentLink1Description=https://datasheet.ciiva.com/11809/0900766b80d98b5e-11809588.pdf?src-supplier=RSComponents, ComponentLink1URL=https://datasheet.ciiva.com/11809/0900766b80d98b5e-11809588.pdf?src-supplier=RSComponents, ComponentLink2Description=https://datasheet.ciiva.com/16391/dcrcwe3-16391542.pdf?src-supplier=Future+Electronics, ComponentLink2URL=https://datasheet.ciiva.com/16391/dcrcwe3-16391542.pdf?src-supplier=Future+Electronics, ComponentLink3Description=https://datasheet.ciiva.com/26316/fld-crcw-e3-data-en-26316457.pdf?src-supplier=Distrelec, ComponentLink3URL=https://datasheet.ciiva.com/26316/fld-crcw-e3-data-en-26316457.pdf?src-supplier=Distrelec, ComponentLink4Description=https://datasheet.ciiva.com/2497/dcrcwe3-2497228.pdf?src-supplier=Digi-Key, ComponentLink4URL=https://datasheet.ciiva.com/2497/dcrcwe3-2497228.pdf?src-supplier=Digi-Key, ComponentLink5Description=https://datasheet.ciiva.com/16894/dcrcwe3-16894631.pdf?src-supplier=Avnet+Europe, ComponentLink5URL=https://datasheet.ciiva.com/16894/dcrcwe3-16894631.pdf?src-supplier=Avnet+Europe, ComponentLink6Description=https://datasheet.ciiva.com/22674/1847332-22674727.pdf?src-supplier=Element14, ComponentLink6URL=https://datasheet.ciiva.com/22674/1847332-22674727.pdf?src-supplier=Element14, ComponentLink7Description=https://datasheet.ciiva.com/7841/1697337-7841753.pdf?src-supplier=Element14, ComponentLink7URL=https://datasheet.ciiva.com/7841/1697337-7841753.pdf?src-supplier=Element14, ComponentLink8Description=https://datasheet.ciiva.com/5552/dcrcwe3-109170-5552411.pdf?src-supplier=Mouser, ComponentLink8URL=https://datasheet.ciiva.com/5552/dcrcwe3-109170-5552411.pdf?src-supplier=Mouser, ComponentLink9Description=https://datasheet.ciiva.com/2497/dcrcwe3-2497229.pdf?src-supplier=Digi-Key, ComponentLink9URL=https://datasheet.ciiva.com/2497/dcrcwe3-2497229.pdf?src-supplier=Digi-Key, ComponentLink10Description=https://datasheet.ciiva.com/2497/dcrcwe3-2497230.pdf?src-supplier=Digi-Key, ComponentLink10URL=https://datasheet.ciiva.com/2497/dcrcwe3-2497230.pdf?src-supplier=Digi-Key, Composition="Thick Film", Contact Plating=Tin, Depth=1.6mm, Features="Automotive AEC-Q200", Height=0.55mm, Lead Free="Lead Free", Length=3.2mm, Manufacturer Part Number=CRCW12063K90FKEA, Military Standard=Not, Number of Terminations=2, Packaging="Tape and Reel", Power Rating=250mW, Price=0.0168, Pricing="10=0.0415, 100=0.0276, 500=0.0231, 1000=0.0135, 2500=0.0116 (EUR)", Radiation Hardening=No, REACH SVHC=Unknown, RoHS=Yes, Stock=14947, Supplier 1=Farnell, Termination=SMD/SMT, Voltage Rating (DC)=200V, Weight=0.000353oz, Width=1.6mm
R19: library part CRCW060333K0FKEA, "RES SMD 33K OHM 1% 1/10W 0603", Case/Package=0603, Case Code (Metric)=1608, Manufacturer=Vishay, Max Operating Temperature=155°C, Max Power Dissipation=100mW, Min Operating Temperature=-55°C, Package Quantity=10, Resistance=33kR, Supplier Part Number 1=1469801, Temperature Coefficient=100ppm/°C, Tolerance=1%, Voltage Rating=75V, Case Code (Imperial)=0603, ComponentLink1Description=https://datasheet.ciiva.com/11809/0900766b80d98afc-11809071.pdf?src-supplier=RSComponents, ComponentLink1URL=https://datasheet.ciiva.com/11809/0900766b80d98afc-11809071.pdf?src-supplier=RSComponents, ComponentLink2Description=https://datasheet.ciiva.com/5547/dcrcwe3-109170-5547006.pdf?src-supplier=Mouser, ComponentLink2URL=https://datasheet.ciiva.com/5547/dcrcwe3-109170-5547006.pdf?src-supplier=Mouser, ComponentLink3Description=https://datasheet.ciiva.com/2525/dcrcwe3-2525247.pdf?src-supplier=Digi-Key, ComponentLink3URL=https://datasheet.ciiva.com/2525/dcrcwe3-2525247.pdf?src-supplier=Digi-Key, ComponentLink4Description=https://datasheet.ciiva.com/7841/1697337-7841829.pdf?src-supplier=Element14, ComponentLink4URL=https://datasheet.ciiva.com/7841/1697337-7841829.pdf?src-supplier=Element14, ComponentLink5Description=https://datasheet.ciiva.com/16884/dcrcwe3-16884901.pdf?src-supplier=Avnet+Europe, ComponentLink5URL=https://datasheet.ciiva.com/16884/dcrcwe3-16884901.pdf?src-supplier=Avnet+Europe, ComponentLink6Description=https://datasheet.ciiva.com/16777/70201119-16777127.pdf?src-supplier=Allied+Electronics, ComponentLink6URL=https://datasheet.ciiva.com/16777/70201119-16777127.pdf?src-supplier=Allied+Electronics, ComponentLink7Description=https://datasheet.ciiva.com/17045/dcrcwe3-17045447.pdf?src-supplier=Future+Electronics, ComponentLink7URL=https://datasheet.ciiva.com/17045/dcrcwe3-17045447.pdf?src-supplier=Future+Electronics, ComponentLink8Description=https://datasheet.ciiva.com/3257/dcrcwe3-3257468.pdf?src-supplier=Avnet, ComponentLink8URL=https://datasheet.ciiva.com/3257/dcrcwe3-3257468.pdf?src-supplier=Avnet, ComponentLink9Description=https://datasheet.ciiva.com/2525/dcrcwe3-2525245.pdf?src-supplier=Digi-Key, ComponentLink9URL=https://datasheet.ciiva.com/2525/dcrcwe3-2525245.pdf?src-supplier=Digi-Key, ComponentLink10Description=https://datasheet.ciiva.com/2525/dcrcwe3-2525246.pdf?src-supplier=Digi-Key, ComponentLink10URL=https://datasheet.ciiva.com/2525/dcrcwe3-2525246.pdf?src-supplier=Digi-Key, ComponentLink11Description=https://datasheet.ciiva.com/26314/fld-crcw-e3-data-en-26314670.pdf?src-supplier=Distrelec, ComponentLink11URL=https://datasheet.ciiva.com/26314/fld-crcw-e3-data-en-26314670.pdf?src-supplier=Distrelec, Composition="Thick Film", Contact Plating=Tin, Depth=0.85mm, Features="Automotive AEC-Q200", Height=0.45mm, Lead Free="Lead Free", Length=1.55mm, Manufacturer Part Number=CRCW060333K0FKEA, Military Standard=Not, Mount="Surface Mount", Number of Terminations=2, Packaging="Tape and Reel", Power Rating=100mW, Price=0.0093, Pricing="10=0.0112, 100=0.0092, 500=0.0084, 1000=0.0075 (EUR)", Radiation Hardening=No, REACH SVHC=Unknown, RoHS=Yes, Stock=69037, Supplier 1=Farnell, Termination=SMD/SMT, Voltage Rating (DC)=75V, Weight=7.1E-05oz, Width=0.033inch
REG1 REG2: library part TS78L05CXRFG, "TAIWAN SEMICONDUCTOR - TS78L05CX RFG - REG 3-TERMINAL 100MA, SMD, SOT23-3", Case/Package=SOT-23, Manufacturer="Taiwan Semiconductor", Max Input Voltage=35V, Max Operating Temperature=125°C, Min Input Voltage=0uV, Min Operating Temperature=0°C, Nominal Output Voltage=5V, Output Current=100mA, Supplier Part Number 1=1476698, ComponentLink1Description=http://www.farnell.com/datasheets/2044138.pdf?src-supplier=Farnell, ComponentLink1URL=http://www.farnell.com/datasheets/2044138.pdf?src-supplier=Farnell, ComponentLink2Description=http://www.farnell.com/datasheets/4546.pdf?src-supplier=Element14, ComponentLink2URL=http://www.farnell.com/datasheets/4546.pdf?src-supplier=Element14, ComponentLink3Description=http://www.taiwansemi.com/products/datasheet/TS78L00_I15.pdf?src-supplier=Digi-Key, ComponentLink3URL=http://www.taiwansemi.com/products/datasheet/TS78L00_I15.pdf?src-supplier=Digi-Key, Manufacturer Part Number=TS78L05CXRFG, Number of Outputs=1, Number of Pins=3, Packaging="Cut Tape", Price=0.262, Pricing="5=0.101, 50=0.099, 100=0.097, 250=0.0949, 500=0.0929, 1000=0.0909, 5000=0.0889, 10000=0.0869 (EUR)", REACH SVHC="No SVHC", RoHS=Yes, Stock=0, Supplier 1=Farnell